# EAGLE board Interactive_SparkFun_Badge-RomePanel-v10 (EAGLE 6.6.0)
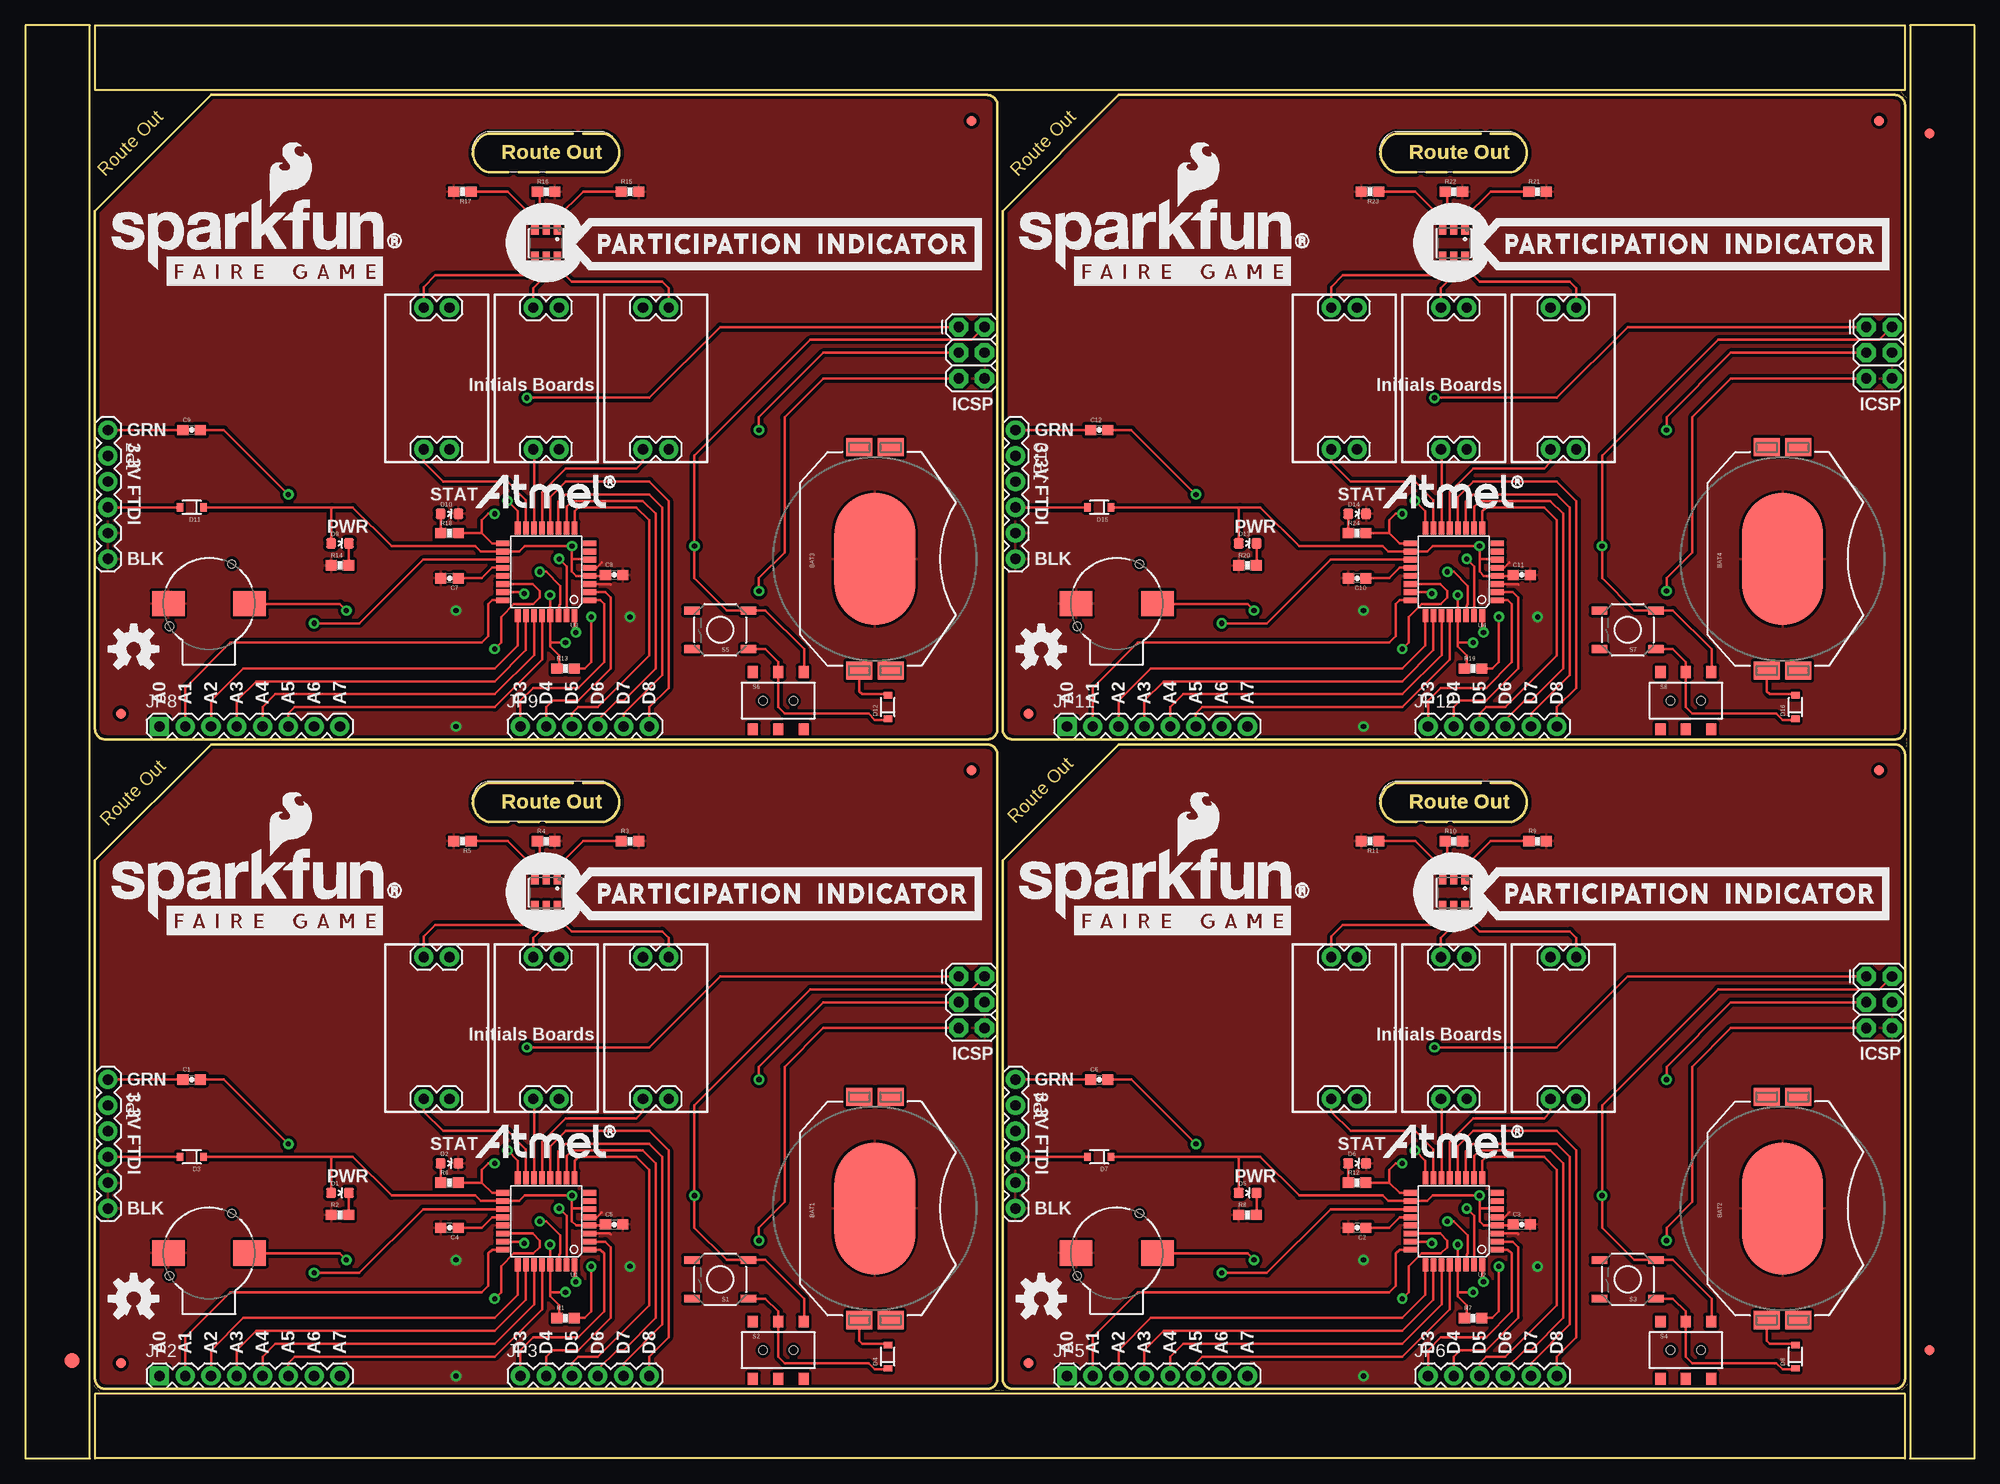
[diagram p0: board, top side]
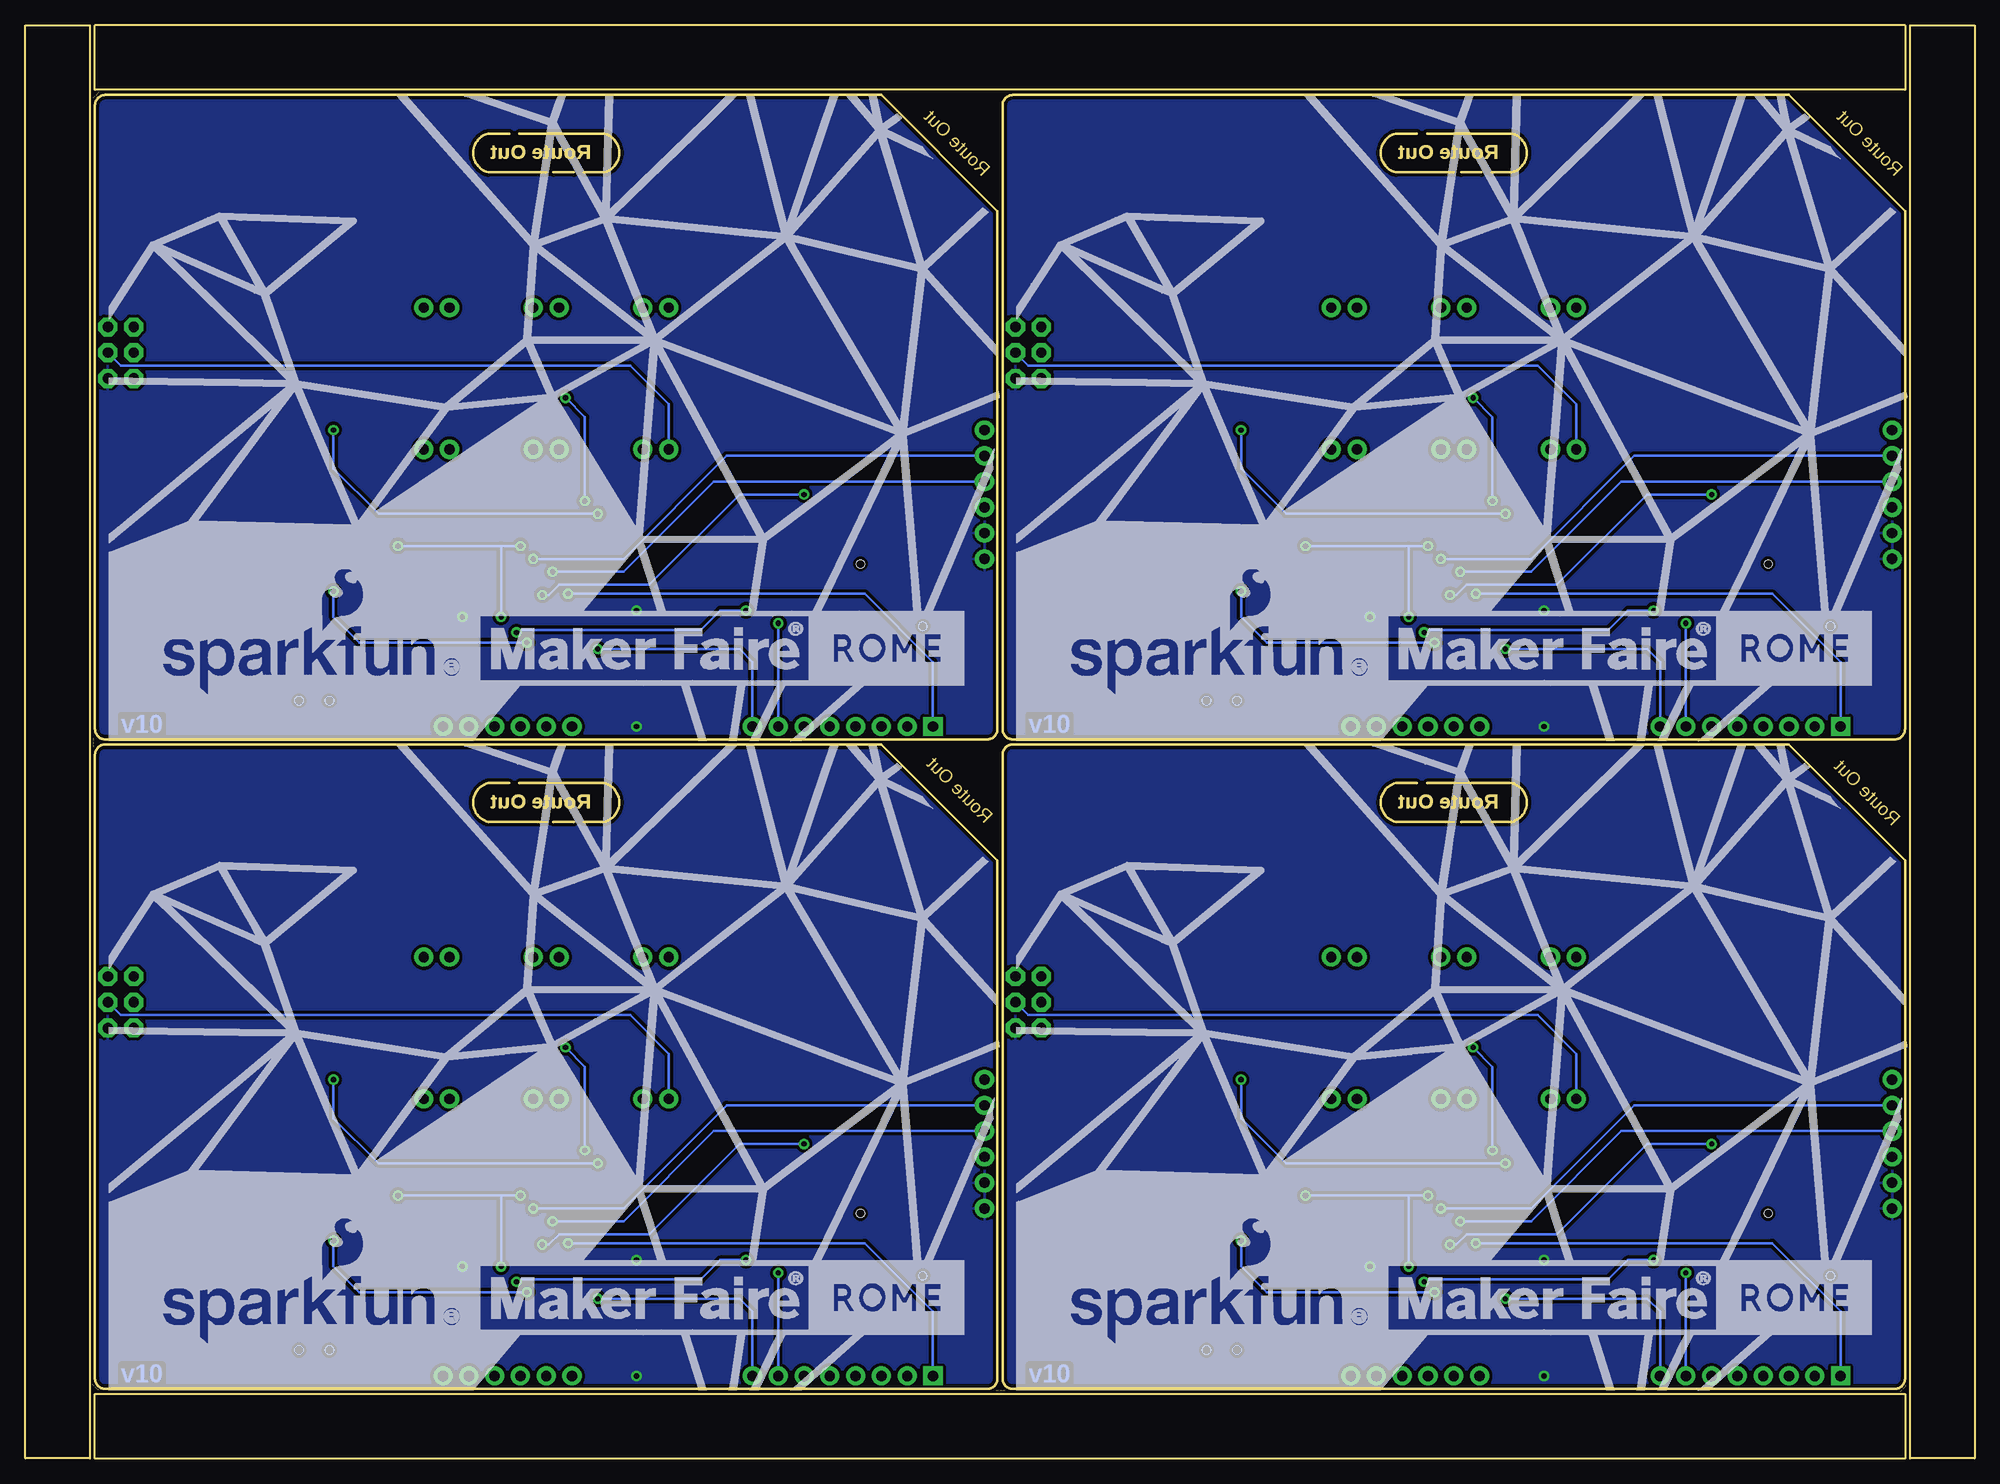
[diagram p1: board, bottom side, seen from below]

Size 192.02 x 141.22 mm. Coordinates in mm from the lower left corner, seen from the top.
Outline: 6.86,58.93 6.86,7.86 arc90 7.86,6.86 94.76,6.86 arc90 95.76,7.86 95.76,69.36 arc90 94.76,70.36 18.29,70.36 6.86,58.93
Outline: 45.59,62.74 arc-152 45.59,66.55 51.94,66.55 57.02,66.55 arc-152 57.02,62.74 51.31,62.74 45.59,62.74
Outline: 96.27,58.93 96.27,7.86 arc90 97.27,6.86 184.17,6.86 arc90 185.17,7.86 185.17,69.36 arc90 184.17,70.36 107.7,70.36 96.27,58.93
Outline: 135,62.74 arc-152 135,66.55 141.35,66.55 146.43,66.55 arc-152 146.43,62.74 140.72,62.74 135,62.74
Outline: 6.86,122.94 6.86,71.87 arc90 7.86,70.87 94.76,70.87 arc90 95.76,71.87 95.76,133.37 arc90 94.76,134.37 18.29,134.37 6.86,122.94
Outline: 45.59,126.75 arc-152 45.59,130.56 51.94,130.56 57.02,130.56 arc-152 57.02,126.75 51.31,126.75 45.59,126.75
Outline: 96.27,122.94 96.27,71.87 arc90 97.27,70.87 184.17,70.87 arc90 185.17,71.87 185.17,133.37 arc90 184.17,134.37 107.7,134.37 96.27,122.94
Outline: 135,126.75 arc-152 135,130.56 141.35,130.56 146.43,130.56 arc-152 146.43,126.75 140.72,126.75 135,126.75
Outline: 6.35,0 6.35,141.22 0,141.22 0,0 6.35,0
Outline: 6.86,6.35 6.86,0 185.17,0 185.17,6.35 6.86,6.35
Outline: 192.02,0 192.02,141.22 185.67,141.22 185.67,0 192.02,0
Outline: 185.17,134.87 185.17,141.22 6.86,141.22 6.86,134.87 185.17,134.87
Copper layers (1*16): Top 0.035mm / dielectric 1.5mm / Bottom 0.035mm
Design rules "SparkFun-2-layer": minimum track width 7mil, minimum drill 15mil, track to track 8mil, track to pad 8mil, pad to pad 8mil, via to via 8mil, smd to smd 8mil, copper to edge 8mil, drill to drill 8mil, minimum pad ring 12mil, minimum via ring 10mil, stop-mask expansion 4mil, vias tented up to drill 20mil, thermal gap 10mil

## Footprints (pad centres in the part's own frame; a part is rotated, then mirrored left to right if it is on the bottom)
BATTCON_20MM_4LEGS = smd 1.778 x 2.54: 1 -11,1.55; 3 11,1.55; P$1 -11,-1.55; P$2 11,-1.55 | smd 13 x 8: 2 0,0
0603-CAP = smd 1.1 x 1: 1 -0.85,0; 2 0.85,0
LED-0603 = smd 1 x 1: A 0,-0.877; C 0,0.877
SOD-323 = smd 0.63 x 0.83: A 1.15,0; C -1.15,0
FIDUCIAL-1.5X3 = smd 1.5 x 1.5: 1 0,0
FIDUCIAL-1X2 = smd 1 x 1: 1 0,0
2X3 = drill 1.016 pad 1.88 octagon: 1 0,0; 2 0,2.54; 3 2.54,0; 4 2.54,2.54; 5 5.08,0; 6 5.08,2.54
FTDI_BASIC = drill 1.016 pad 1.88: CTS 10.16,0; DTR 0,0; GND 12.7,0; RXI 2.54,0; TXO 5.08,0; VCC 7.62,0
1X08 = drill 1.016 pad 1.88 square: 1 0,0 | drill 1.016 pad 1.88: 2 2.54,0; 3 5.08,0; 4 7.62,0; 5 10.16,0; 6 12.7,0; 7 15.24,0; 8 17.78,0
1X06 = drill 1.016 pad 1.88: CTS 10.16,0; DTR 0,0; GND 12.7,0; RXI 2.54,0; TXO 5.08,0; VCC 7.62,0
0603-RES = smd 1.1 x 1: 1 -0.85,0; 2 0.85,0
TACTILE-SWITCH-SMD = smd 1.524 x 0.762: 1 -2.794,1.905; 2 2.794,1.905; 3 -2.794,-1.905; 4 2.794,-1.905
AYZ0202 = smd 1 x 1.15: 1 -2.5,2.825; 2 0,2.825; 3 2.5,2.825; 4 -2.5,-2.825; 5 0,-2.825; 6 2.5,-2.825 | hole 0.85: 1.5,0; -1.5,0
BUZZER-CCV = smd 3.2 x 2.5: + 4,0; - -4,0 | hole 0.8: -3.9,-2.25; 2.25,3.9
TQFP32-08 = smd 1.27 x 0.559: 1 -4.293,2.8; 2 -4.293,2; 3 -4.293,1.2; 4 -4.293,0.4; 5 -4.293,-0.4; 6 -4.293,-1.2; 7 -4.293,-2; 8 -4.293,-2.8; 17 4.293,-2.8; 18 4.293,-2; 19 4.293,-1.2; 20 4.293,-0.4; 21 4.293,0.4; 22 4.293,1.2; 23 4.293,2; 24 4.293,2.8 | smd 0.559 x 1.27: 9 -2.8,-4.293; 10 -2,-4.293; 11 -1.2,-4.293; 12 -0.4,-4.293; 13 0.4,-4.293; 14 1.2,-4.293; 15 2,-4.293; 16 2.8,-4.293; 25 2.8,4.293; 26 2,4.293; 27 1.2,4.293; 28 0.4,4.293; 29 -0.4,4.293; 30 -1.2,4.293; 31 -2,4.293; 32 -2.8,4.293
PLCC-6-LED = smd 0.7 x 1.3: AB -1.1,1.475; AG 1.1,1.475; AR 0,1.475; CB -1.1,-1.475; CG 1.1,-1.475; CR 0,-1.475
INITIALS = drill 1.016 pad 1.88: 1 3.81,1.27; 2 6.35,1.27; 3 3.81,15.24; 4 6.35,15.24; 5 14.605,1.27; 6 17.145,1.27; 7 14.605,15.24; 8 17.145,15.24; 9 25.4,1.27; 10 27.94,1.27; 11 25.4,15.24; 12 27.94,15.24

## Placement (x,y rotation side)
BAT1  20mm coincell  [BATTCON_20MM_4LEGS]  83.69,24.64 90 top
BAT2  20mm coincell  [BATTCON_20MM_4LEGS]  173.1,24.64 90 top
BAT3  20mm coincell  [BATTCON_20MM_4LEGS]  83.69,88.65 90 top
BAT4  20mm coincell  [BATTCON_20MM_4LEGS]  173.1,88.65 90 top
C1  0.1uF  [0603-CAP]  16.38,37.34 0 top
C2  0.1uF  [0603-CAP]  131.19,22.73 180 top
C3  0.1uF  [0603-CAP]  147.41,23.06 0 top
C4  0.1uF  [0603-CAP]  41.78,22.73 180 top
C5  0.1uF  [0603-CAP]  58,23.06 0 top
C6  0.1uF  [0603-CAP]  105.79,37.34 0 top
C7  0.1uF  [0603-CAP]  41.78,86.74 180 top
C8  0.1uF  [0603-CAP]  58,87.07 0 top
C9  0.1uF  [0603-CAP]  16.38,101.35 0 top
C10  0.1uF  [0603-CAP]  131.19,86.74 180 top
C11  0.1uF  [0603-CAP]  147.41,87.07 0 top
C12  0.1uF  [0603-CAP]  105.79,101.35 0 top
D1  RED  [LED-0603]  31,26.17 270 top
D2  GREEN  [LED-0603]  41.78,29.08 270 top
D3  DIODE-ZENER3.3V  [SOD-323]  16.38,29.72 180 top
D4  DIODE-ZENER3.3V  [SOD-323]  84.96,10.03 90 top
D5  RED  [LED-0603]  120.41,26.17 270 top
D6  GREEN  [LED-0603]  131.19,29.08 270 top
D7  DIODE-ZENER3.3V  [SOD-323]  105.79,29.72 180 top
D8  DIODE-ZENER3.3V  [SOD-323]  174.37,10.03 90 top
D9  RED  [LED-0603]  31,90.18 270 top
D10  GREEN  [LED-0603]  41.78,93.09 270 top
D11  DIODE-ZENER3.3V  [SOD-323]  16.38,93.73 180 top
D12  DIODE-ZENER3.3V  [SOD-323]  84.96,74.04 90 top
D13  RED  [LED-0603]  120.41,90.18 270 top
D14  GREEN  [LED-0603]  131.19,93.09 270 top
D15  DIODE-ZENER3.3V  [SOD-323]  105.79,93.73 180 top
D16  DIODE-ZENER3.3V  [SOD-323]  174.37,74.04 90 top
E$1  [FIDUCIAL-1.5X3]  4.57,9.65 0 top
E$4  [FIDUCIAL-1X2]  187.58,10.67 0 top
E$6  [FIDUCIAL-1X2]  187.58,130.56 180 top
FID1  FIDUCIAL1X2  [FIDUCIAL-1X2]  9.4,9.4 0 top
FID2  FIDUCIAL1X2  [FIDUCIAL-1X2]  93.22,67.82 0 top
FID3  FIDUCIAL1X2  [FIDUCIAL-1X2]  98.81,9.4 0 top
FID4  FIDUCIAL1X2  [FIDUCIAL-1X2]  182.63,67.82 0 top
FID5  FIDUCIAL1X2  [FIDUCIAL-1X2]  9.4,73.41 0 top
FID6  FIDUCIAL1X2  [FIDUCIAL-1X2]  93.22,131.83 0 top
FID7  FIDUCIAL1X2  [FIDUCIAL-1X2]  98.81,73.41 0 top
FID8  FIDUCIAL1X2  [FIDUCIAL-1X2]  182.63,131.83 0 top
J1  AVR_SPI_PRG_6PTH  [2X3]  91.95,47.5 270 top
J2  AVR_SPI_PRG_6PTH  [2X3]  181.36,47.5 270 top
J3  AVR_SPI_PRG_6PTH  [2X3]  91.95,111.51 270 top
J4  AVR_SPI_PRG_6PTH  [2X3]  181.36,111.51 270 top
JP1  FTDI_BASICPTH  [FTDI_BASIC]  8.13,37.34 270 top
JP2  [1X08]  13.21,8.13 0 top
JP3  [1X06]  48.77,8.13 0 top
JP4  FTDI_BASICPTH  [FTDI_BASIC]  97.54,37.34 270 top
JP5  [1X08]  102.62,8.13 0 top
JP6  [1X06]  138.18,8.13 0 top
JP7  FTDI_BASICPTH  [FTDI_BASIC]  8.13,101.35 270 top
JP8  [1X08]  13.21,72.14 0 top
JP9  [1X06]  48.77,72.14 0 top
JP10  FTDI_BASICPTH  [FTDI_BASIC]  97.54,101.35 270 top
JP11  [1X08]  102.62,72.14 0 top
JP12  [1X06]  138.18,72.14 0 top
LOGO1  OSHW-LOGOM  [OSHW-LOGO-M]  10.67,15.75 0 top
LOGO2  OSHW-LOGOM  [OSHW-LOGO-M]  100.08,15.75 0 top
LOGO3  OSHW-LOGOM  [OSHW-LOGO-M]  10.67,79.76 0 top
LOGO4  OSHW-LOGOM  [OSHW-LOGO-M]  100.08,79.76 0 top
R1  10K  [0603-RES]  53.21,13.84 0 top
R2  10K  [0603-RES]  30.99,24 0 top
R3  300  [0603-RES]  59.56,60.83 0 top
R4  100  [0603-RES]  51.31,60.83 0 top
R5  100  [0603-RES]  43.05,60.83 180 top
R6  330  [0603-RES]  41.78,27.18 0 top
R7  10K  [0603-RES]  142.62,13.84 0 top
R8  10K  [0603-RES]  120.4,24 0 top
R9  300  [0603-RES]  148.97,60.83 0 top
R10  100  [0603-RES]  140.72,60.83 0 top
R11  100  [0603-RES]  132.46,60.83 180 top
R12  330  [0603-RES]  131.19,27.18 0 top
R13  10K  [0603-RES]  53.21,77.85 0 top
R14  10K  [0603-RES]  30.99,88.01 0 top
R15  300  [0603-RES]  59.56,124.84 0 top
R16  100  [0603-RES]  51.31,124.84 0 top
R17  100  [0603-RES]  43.05,124.84 180 top
R18  330  [0603-RES]  41.78,91.19 0 top
R19  10K  [0603-RES]  142.62,77.85 0 top
R20  10K  [0603-RES]  120.4,88.01 0 top
R21  300  [0603-RES]  148.97,124.84 0 top
R22  100  [0603-RES]  140.72,124.84 0 top
R23  100  [0603-RES]  132.46,124.84 180 top
R24  330  [0603-RES]  131.19,91.19 0 top
S1  [TACTILE-SWITCH-SMD]  68.45,17.65 180 top
S2  [AYZ0202]  74.17,10.67 0 top
S3  [TACTILE-SWITCH-SMD]  157.86,17.65 180 top
S4  [AYZ0202]  163.58,10.67 0 top
S5  [TACTILE-SWITCH-SMD]  68.45,81.66 180 top
S6  [AYZ0202]  74.17,74.68 0 top
S7  [TACTILE-SWITCH-SMD]  157.86,81.66 180 top
S8  [AYZ0202]  163.58,74.68 0 top
SG1  BUZZERSMD2  [BUZZER-CCV]  18.1,20.24 0 top
SG2  BUZZERSMD2  [BUZZER-CCV]  107.51,20.24 0 top
SG3  BUZZERSMD2  [BUZZER-CCV]  18.1,84.25 0 top
SG4  BUZZERSMD2  [BUZZER-CCV]  107.51,84.25 0 top
U1  ATMEGA328P  [TQFP32-08]  51.31,23.37 180 top
U2  ATMEGA328P  [TQFP32-08]  140.72,23.37 180 top
U3  ATMEGA328P  [TQFP32-08]  51.31,87.38 180 top
U4  ATMEGA328P  [TQFP32-08]  140.72,87.38 180 top
U$1  LED-TRICOLOR-NO-COMPLCC-6-SMD  [PLCC-6-LED]  51.31,55.75 180 top
U$2  ROME_FAIRE_BACK  [ROME_BACK]  5.59,3.05 0 top
U$3  ALPHABET  [INITIALS]  67.18,50.67 180 top
U$4  FAIRE_GAME_SILK  [FAIRE_GAME_SILK]  6.22,6.1 0 top
U$5  LED-TRICOLOR-NO-COMPLCC-6-SMD  [PLCC-6-LED]  140.72,55.75 180 top
U$6  ALPHABET  [INITIALS]  156.59,50.67 180 top
U$7  FAIRE_GAME_SILK  [FAIRE_GAME_SILK]  95.63,6.1 0 top
U$8  ROME_FAIRE_BACK  [ROME_BACK]  95,3.05 0 top
U$9  LED-TRICOLOR-NO-COMPLCC-6-SMD  [PLCC-6-LED]  51.31,119.76 180 top
U$10  ALPHABET  [INITIALS]  67.18,114.68 180 top
U$11  FAIRE_GAME_SILK  [FAIRE_GAME_SILK]  6.22,70.1 0 top
U$12  ROME_FAIRE_BACK  [ROME_BACK]  5.59,67.06 0 top
U$13  LED-TRICOLOR-NO-COMPLCC-6-SMD  [PLCC-6-LED]  140.72,119.76 180 top
U$14  ALPHABET  [INITIALS]  156.59,114.68 180 top
U$15  FAIRE_GAME_SILK  [FAIRE_GAME_SILK]  95.63,70.1 0 top
U$16  ROME_FAIRE_BACK  [ROME_BACK]  95,67.06 0 top

## Library data of the parts
BAT1-BAT4 = SparkFun-Electromechanical; PROD_ID: BATT-10373
C1-C12 = SparkFun-Capacitors; PROD_ID: CAP-00810
D1 D5 D9 D13 = SparkFun-LED; PROD_ID: DIO-00819
D2 D6 D10 D14 = SparkFun-LED; PROD_ID: DIO-00821
D3 D4 D7 D8 D11 D12 D15 D16 = SparkFun-DiscreteSemi; PROD_ID: DIO-11284
E$1 = SparkFun-Retired
E$4 E$6 FID1-FID8 LOGO1-LOGO4 = SparkFun-Aesthetics
J1-J4 JP1-JP12 = SparkFun-Connectors
R1 R2 R7 R8 R13 R14 R19 R20 = SparkFun-Resistors; PROD_ID: RES-00824
R3 R9 R15 R21 = SparkFun-Resistors; PROD_ID: RES_10328
R4 R5 R10 R11 R16 R17 R22 R23 = SparkFun-Resistors; PROD_ID: RES-07863
R6 R12 R18 R24 = SparkFun-Resistors; PROD_ID: RES-00818
S1 S3 S5 S7 SG1-SG4 = SparkFun-Electromechanical
S2 S4 S6 S8 = SparkFun-Electromechanical; PROD_ID: SWCH-08179
U1-U4 = SparkFun-DigitalIC; PROD_ID: IC-09069
U$1 U$5 U$9 U$13 = SparkFun-LED; PROD_ID: DIO-12113
U$2 U$4 U$7 U$8 U$11 U$12 U$15 U$16 = Local Library
U$3 U$6 U$10 U$14 = ML8511

## Nets
3.3V: D3.A JP1.VCC
3.3V1: D7.A JP4.VCC
3.3V2: D11.A JP7.VCC
3.3V3: D15.A JP10.VCC
A0: JP2.1 U1.23
A1: JP2.2 U1.24
A2: JP2.3 U1.25
A3: JP2.4 U1.26
A4: JP5.1 U2.23
A5: JP5.2 U2.24
A6: JP2.7 U1.19
A7: JP2.8 U1.22
A8: JP5.3 U2.25
A9: JP5.4 U2.26
A10: JP5.7 U2.19
A11: JP5.8 U2.22
A12: JP8.1 U3.23
A13: JP8.2 U3.24
A14: JP8.3 U3.25
A15: JP8.4 U3.26
A16: JP8.7 U3.19
A17: JP8.8 U3.22
A18: JP11.1 U4.23
A19: JP11.2 U4.24
A20: JP11.3 U4.25
A21: JP11.4 U4.26
A22: JP11.7 U4.19
A23: JP11.8 U4.22
BLUE: U$1.AB U$3.1
BLUE1: U$5.AB U$6.1
BLUE2: U$9.AB U$10.1
BLUE3: U$13.AB U$14.1
D1: SG2.+ U2.32
D2: SG1.+ U1.32
D3: JP3.DTR U1.1
D4: JP3.RXI U1.2
D5: JP3.TXO U1.9
D6: JP3.VCC U1.10
D7: JP3.CTS U1.11
D8: JP3.GND U1.12
D9: U1.13 U$3.4
D10: U1.14 U$3.8
D11: JP6.DTR U2.1
D12: JP6.RXI U2.2
D13: JP6.TXO U2.9
D14: JP6.VCC U2.10
D15: JP6.CTS U2.11
D16: JP6.GND U2.12
D17: U2.13 U$6.4
D18: U2.14 U$6.8
D19: SG3.+ U3.32
D20: JP9.DTR U3.1
D21: JP9.RXI U3.2
D22: JP9.TXO U3.9
D23: JP9.VCC U3.10
D24: JP9.CTS U3.11
D25: JP9.GND U3.12
D26: U3.13 U$10.4
D27: U3.14 U$10.8
D28: SG4.+ U4.32
D29: JP12.DTR U4.1
D30: JP12.RXI U4.2
D31: JP12.TXO U4.9
D32: JP12.VCC U4.10
D33: JP12.CTS U4.11
D34: JP12.GND U4.12
D35: U4.13 U$14.4
D36: U4.14 U$14.8
DTR: C1.1 JP1.DTR
DTR1: C6.1 JP4.DTR
DTR2: C9.1 JP7.DTR
DTR3: C12.1 JP10.DTR
GND: BAT1.2 C4.2 C5.2 D2.C J1.6 JP1.CTS JP1.GND R2.1 R3.2 R4.2 R5.2 SG1.- U1.3 U1.5 U1.21
GND1: BAT2.2 C2.2 C3.2 D6.C J2.6 JP4.CTS JP4.GND R8.1 R9.2 R10.2 R11.2 SG2.- U2.3 U2.5 U2.21
GND2: BAT3.2 C7.2 C8.2 D10.C J3.6 JP7.CTS JP7.GND R14.1 R15.2 R16.2 R17.2 SG3.- U3.3 U3.5 U3.21
GND3: BAT4.2 C10.2 C11.2 D14.C J4.6 JP10.CTS JP10.GND R20.1 R21.2 R22.2 R23.2 SG4.- U4.3 U4.5 U4.21
GREEN: U$1.AG U$3.10
GREEN1: U$5.AG U$6.10
GREEN2: U$9.AG U$10.10
GREEN3: U$13.AG U$14.10
MISO: J1.1 U1.16
MISO1: J2.1 U2.16
MISO2: J3.1 U3.16
MISO3: J4.1 U4.16
MOSI: J1.4 U1.15 U$3.12
MOSI1: J2.4 U2.15 U$6.12
MOSI2: J3.4 U3.15 U$10.12
MOSI3: J4.4 U4.15 U$14.12
N$1: D4.C S1.1 S2.2
N$2: C2.1 U2.20
N$3: D5.C R8.2
N$4: R3.1 U$1.CB
N$5: D1.C R2.2
N$6: R4.1 U$1.CR
N$7: R5.1 U$1.CG
N$8: C4.1 U1.20
N$9: D2.A R6.1
N$10: BAT1.1 D4.A
N$11: R9.1 U$5.CB
N$12: R11.1 U$5.CG
N$13: R10.1 U$5.CR
N$14: D6.A R12.1
N$15: BAT2.1 D8.A
N$16: D8.C S3.1 S4.2
N$17: C7.1 U3.20
N$18: D9.C R14.2
N$19: R15.1 U$9.CB
N$20: R17.1 U$9.CG
N$21: R16.1 U$9.CR
N$22: D10.A R18.1
N$23: BAT3.1 D12.A
N$24: D12.C S5.1 S6.2
N$25: C10.1 U4.20
N$26: D13.C R20.2
N$27: R21.1 U$13.CB
N$28: R23.1 U$13.CG
N$29: R22.1 U$13.CR
N$30: D14.A R24.1
N$31: BAT4.1 D16.A
N$32: D16.C S7.1 S8.2
RED: U$1.AR U$3.6
RED1: U$5.AR U$6.6
RED2: U$9.AR U$10.6
RED3: U$13.AR U$14.6
RESET: C1.2 J1.5 R1.1 U1.29
RESET1: C6.2 J2.5 R7.1 U2.29
RESET2: C9.2 J3.5 R13.1 U3.29
RESET3: C12.2 J4.5 R19.1 U4.29
RXI: JP1.TXO U1.30
RXI1: JP4.TXO U2.30
RXI2: JP7.TXO U3.30
RXI3: JP10.TXO U4.30
SCK: J1.3 R6.2 U1.17
SCK1: J2.3 R12.2 U2.17
SCK2: J3.3 R18.2 U3.17
SCK3: J4.3 R24.2 U4.17
SCL: JP2.6 U1.28
SCL1: JP5.6 U2.28
SCL2: JP8.6 U3.28
SCL3: JP11.6 U4.28
SDA: JP2.5 U1.27
SDA1: JP5.5 U2.27
SDA2: JP8.5 U3.27
SDA3: JP11.5 U4.27
TXO: JP1.RXI U1.31
TXO1: JP4.RXI U2.31
TXO2: JP7.RXI U3.31
TXO3: JP10.RXI U4.31
VCC: C5.1 D1.A D3.C J1.2 R1.2 S1.3 S2.3 U1.4 U1.6 U1.18
VCC1: C3.1 D5.A D7.C J2.2 R7.2 S3.3 S4.3 U2.4 U2.6 U2.18
VCC2: C8.1 D9.A D11.C J3.2 R13.2 S5.3 S6.3 U3.4 U3.6 U3.18
VCC3: C11.1 D13.A D15.C J4.2 R19.2 S7.3 S8.3 U4.4 U4.6 U4.18

## Tracks (layer width: path | path; a pad name or v marks a point on that pad's centre or on a via)
3.3V
  Top 0.254: JP1.VCC D3.A
3.3V1
  Top 0.254: JP4.VCC D7.A
3.3V2
  Top 0.254: JP7.VCC D11.A
3.3V3
  Top 0.254: JP10.VCC D15.A
A0  (via drill 0.51)
  Top 0.254: U1.23 48.99,21.37 v49.15,21.21
  Bottom 0.254: v49.15,21.21 19.94,21.21 13.21,14.48 JP2.1
A1
  Top 0.254: U1.24 45.97,20.57 45.59,20.19 45.59,17.02 44.96,16.38 20.19,16.38 15.75,11.94 JP2.2
A2
  Top 0.254: U1.25 48.51,16.12 46.23,13.84 21.46,13.84 18.29,10.67 JP2.3
A3
  Top 0.254: U1.26 49.31,15.65 46.23,12.57 22.73,12.57 20.83,10.67 JP2.4
A4  (via drill 0.51)
  Top 0.254: U2.23 138.4,21.37 v138.56,21.21
  Bottom 0.254: v138.56,21.21 109.35,21.21 102.62,14.48 JP5.1
A5
  Top 0.254: U2.24 135.38,20.57 135,20.19 135,17.02 134.37,16.38 109.6,16.38 105.16,11.94 JP5.2
A6  (via drill 0.51)
  Top 0.254: U1.19 39.17,24.57 32.89,18.29 v28.45,18.29
  Bottom 0.254: JP2.7 v28.45,18.29
A7  (via drill 0.51)
  Top 0.254: U1.22 49.97,22.17 50.67,21.46 50.67,20.83 50.04,20.19 48.13,20.19 46.86,18.92 46.86,16.38 v46.23,15.75
  Bottom 0.254: v46.23,15.75 32.26,15.75 30.99,14.48 JP2.8
A8
  Top 0.254: U2.25 137.92,16.12 135.64,13.84 110.87,13.84 107.7,10.67 JP5.3
A9
  Top 0.254: U2.26 138.72,15.65 135.64,12.57 112.14,12.57 110.24,10.67 JP5.4
A10  (via drill 0.51)
  Top 0.254: U2.19 128.58,24.57 122.3,18.29 v117.86,18.29
  Bottom 0.254: JP5.7 v117.86,18.29
A11  (via drill 0.51)
  Top 0.254: U2.22 139.38,22.17 140.08,21.46 140.08,20.83 139.45,20.19 137.54,20.19 136.27,18.92 136.27,16.38 v135.64,15.75
  Bottom 0.254: v135.64,15.75 121.67,15.75 120.4,14.48 JP5.8
A12  (via drill 0.51)
  Top 0.254: U3.23 48.99,85.38 v49.15,85.22
  Bottom 0.254: v49.15,85.22 19.94,85.22 13.21,78.49 JP8.1
A13
  Top 0.254: U3.24 45.97,84.58 45.59,84.2 45.59,81.03 44.96,80.39 20.19,80.39 15.75,75.95 JP8.2
A14
  Top 0.254: U3.25 48.51,80.13 46.23,77.85 21.46,77.85 18.29,74.68 JP8.3
A15
  Top 0.254: U3.26 49.31,79.66 46.23,76.58 22.73,76.58 20.83,74.68 JP8.4
A16  (via drill 0.51)
  Top 0.254: U3.19 39.17,88.58 32.89,82.3 v28.45,82.3
  Bottom 0.254: JP8.7 v28.45,82.3
A17  (via drill 0.51)
  Top 0.254: U3.22 49.97,86.18 50.67,85.47 50.67,84.84 50.04,84.2 48.13,84.2 46.86,82.93 46.86,80.39 v46.23,79.76
  Bottom 0.254: v46.23,79.76 32.26,79.76 30.99,78.49 JP8.8
A18  (via drill 0.51)
  Top 0.254: U4.23 138.4,85.38 v138.56,85.22
  Bottom 0.254: v138.56,85.22 109.35,85.22 102.62,78.49 JP11.1
A19
  Top 0.254: U4.24 135.38,84.58 135,84.2 135,81.03 134.37,80.39 109.6,80.39 105.16,75.95 JP11.2
A20
  Top 0.254: U4.25 137.92,80.13 135.64,77.85 110.87,77.85 107.7,74.68 JP11.3
A21
  Top 0.254: U4.26 138.72,79.66 135.64,76.58 112.14,76.58 110.24,74.68 JP11.4
A22  (via drill 0.51)
  Top 0.254: U4.19 128.58,88.58 122.3,82.3 v117.86,82.3
  Bottom 0.254: JP11.7 v117.86,82.3
A23  (via drill 0.51)
  Top 0.254: U4.22 139.38,86.18 140.08,85.47 140.08,84.84 139.45,84.2 137.54,84.2 136.27,82.93 136.27,80.39 v135.64,79.76
  Bottom 0.254: v135.64,79.76 121.67,79.76 120.4,78.49 JP11.8
BLUE
  Top 0.254: U$1.AB 52.41,53.38 53.85,51.94 62.74,51.94 63.37,51.31 U$3.1
BLUE1
  Top 0.254: U$5.AB 141.82,53.38 143.26,51.94 152.15,51.94 152.78,51.31 U$6.1
BLUE2
  Top 0.254: U$9.AB 52.41,117.39 53.85,115.95 62.74,115.95 63.37,115.32 U$10.1
BLUE3
  Top 0.254: U$13.AB 141.82,117.39 143.26,115.95 152.15,115.95 152.78,115.32 U$14.1
D1  (via drill 0.51)
  Top 0.254: U2.32 143.52,17.52 v143.64,17.4 | 112.19,19.56 111.56,20.19 | 111.56,20.19 SG2.+ | 111.56,20.19 120.4,20.19 v121.03,19.56
  Bottom 0.254: v121.03,19.56 123.57,19.56 125.48,17.65 143.38,17.65 v143.64,17.4
D2  (via drill 0.51)
  Top 0.254: U1.32 54.11,17.52 v54.23,17.4 | 22.78,19.56 22.15,20.19 | 22.15,20.19 SG1.+ | 22.15,20.19 30.99,20.19 v31.62,19.56
  Bottom 0.254: v31.62,19.56 34.16,19.56 36.07,17.65 53.98,17.65 v54.23,17.4
D3
  Top 0.254: U1.1 56.65,20.57 57.02,20.19 57.02,14.48 54.48,11.94 50.04,11.94 48.77,10.67 JP3.DTR
D4
  Top 0.254: U1.2 57.12,21.37 57.66,20.83 57.66,13.84 54.48,10.67 51.94,10.67 51.31,10.03 JP3.RXI
D5
  Top 0.254: U1.9 54.11,29.34 54.48,29.72 60.2,29.72 61.47,28.45 61.47,15.11 56.39,10.03 54.48,10.03 53.85,9.4 JP3.TXO
D6
  Top 0.254: U1.10 53.31,29.81 53.85,30.35 60.83,30.35 62.1,29.08 62.1,13.84 58.93,10.67 58.29,10.67 56.39,8.76 JP3.VCC
D7
  Top 0.254: U1.11 52.51,30.28 53.21,30.99 61.47,30.99 62.74,29.72 62.74,13.21 58.93,9.4 JP3.CTS
D8
  Top 0.254: U1.12 51.71,30.75 53.21,32.26 61.47,32.26 63.37,30.35 63.37,11.94 61.47,10.03 JP3.GND
D9
  Top 0.254: U1.13 50.91,31.22 53.21,33.53 60.2,33.53 60.83,34.16 U$3.4
D10
  Top 0.254: U1.14 50.11,35.36 U$3.8
D11
  Top 0.254: U2.1 146.06,20.57 146.43,20.19 146.43,14.48 143.89,11.94 139.45,11.94 138.18,10.67 JP6.DTR
D12
  Top 0.254: U2.2 146.53,21.37 147.07,20.83 147.07,13.84 143.89,10.67 141.35,10.67 140.72,10.03 JP6.RXI
D13
  Top 0.254: U2.9 143.52,29.34 143.89,29.72 149.61,29.72 150.88,28.45 150.88,15.11 145.8,10.03 143.89,10.03 143.26,9.4 JP6.TXO
D14
  Top 0.254: U2.10 142.72,29.81 143.26,30.35 150.24,30.35 151.51,29.08 151.51,13.84 148.34,10.67 147.7,10.67 145.8,8.76 JP6.VCC
D15
  Top 0.254: U2.11 141.92,30.28 142.62,30.99 150.88,30.99 152.15,29.72 152.15,13.21 148.34,9.4 JP6.CTS
D16
  Top 0.254: U2.12 141.12,30.75 142.62,32.26 150.88,32.26 152.78,30.35 152.78,11.94 150.88,10.03 JP6.GND
D17
  Top 0.254: U2.13 140.32,31.22 142.62,33.53 149.61,33.53 150.24,34.16 U$6.4
D18
  Top 0.254: U2.14 139.52,35.36 U$6.8
D19  (via drill 0.51)
  Top 0.254: U3.32 54.11,81.53 v54.23,81.41 | 22.78,83.57 22.15,84.2 | 22.15,84.2 SG3.+ | 22.15,84.2 30.99,84.2 v31.62,83.57
  Bottom 0.254: v31.62,83.57 34.16,83.57 36.07,81.66 53.98,81.66 v54.23,81.41
D20
  Top 0.254: U3.1 56.65,84.58 57.02,84.2 57.02,78.49 54.48,75.95 50.04,75.95 48.77,74.68 JP9.DTR
D21
  Top 0.254: U3.2 57.12,85.38 57.66,84.84 57.66,77.85 54.48,74.68 51.94,74.68 51.31,74.04 JP9.RXI
D22
  Top 0.254: U3.9 54.11,93.35 54.48,93.73 60.2,93.73 61.47,92.46 61.47,79.12 56.39,74.04 54.48,74.04 53.85,73.41 JP9.TXO
D23
  Top 0.254: U3.10 53.31,93.82 53.85,94.36 60.83,94.36 62.1,93.09 62.1,77.85 58.93,74.68 58.29,74.68 56.39,72.77 JP9.VCC
D24
  Top 0.254: U3.11 52.51,94.29 53.21,95 61.47,95 62.74,93.73 62.74,77.22 58.93,73.41 JP9.CTS
D25
  Top 0.254: U3.12 51.71,94.76 53.21,96.27 61.47,96.27 63.37,94.36 63.37,75.95 61.47,74.04 JP9.GND
D26
  Top 0.254: U3.13 50.91,95.23 53.21,97.54 60.2,97.54 60.83,98.17 U$10.4
D27
  Top 0.254: U3.14 50.11,99.37 U$10.8
D28  (via drill 0.51)
  Top 0.254: U4.32 143.52,81.53 v143.64,81.41 | 112.19,83.57 111.56,84.2 | 111.56,84.2 SG4.+ | 111.56,84.2 120.4,84.2 v121.03,83.57
  Bottom 0.254: v121.03,83.57 123.57,83.57 125.48,81.66 143.38,81.66 v143.64,81.41
D29
  Top 0.254: U4.1 146.06,84.58 146.43,84.2 146.43,78.49 143.89,75.95 139.45,75.95 138.18,74.68 JP12.DTR
D30
  Top 0.254: U4.2 146.53,85.38 147.07,84.84 147.07,77.85 143.89,74.68 141.35,74.68 140.72,74.04 JP12.RXI
D31
  Top 0.254: U4.9 143.52,93.35 143.89,93.73 149.61,93.73 150.88,92.46 150.88,79.12 145.8,74.04 143.89,74.04 143.26,73.41 JP12.TXO
D32
  Top 0.254: U4.10 142.72,93.82 143.26,94.36 150.24,94.36 151.51,93.09 151.51,77.85 148.34,74.68 147.7,74.68 145.8,72.77 JP12.VCC
D33
  Top 0.254: U4.11 141.92,94.29 142.62,95 150.88,95 152.15,93.73 152.15,77.22 148.34,73.41 JP12.CTS
D34
  Top 0.254: U4.12 141.12,94.76 142.62,96.27 150.88,96.27 152.78,94.36 152.78,75.95 150.88,74.04 JP12.GND
D35
  Top 0.254: U4.13 140.32,95.23 142.62,97.54 149.61,97.54 150.24,98.17 U$14.4
D36
  Top 0.254: U4.14 139.52,99.37 U$14.8
DTR
  Top 0.254: JP1.DTR C1.1
DTR1
  Top 0.254: JP4.DTR C6.1
DTR2
  Top 0.254: JP7.DTR C9.1
DTR3
  Top 0.254: JP10.DTR C12.1
GND  (via drill 0.51)
  Top 0.254: U1.3 57.59,22.17 57.66,22.1 | U1.5 56.28,23.77 56.77,24.26
  other vias: 42.42,8.13 59.56,18.92 42.42,19.56
  pour Top (isolate 0.305): 6.86,69.72 6.86,7.86 arc90 7.86,6.86 94.76,6.86 arc90 95.76,7.86 95.76,69.36 arc90 94.76,70.36 6.22,70.36
  pour Bottom (isolate 0.305): 6.86,70.36 6.86,7.86 arc90 7.86,6.86 94.76,6.86 arc90 95.76,7.86 95.76,69.36 arc90 94.76,70.36
GND1  (via drill 0.51)
  Top 0.254: U2.3 147,22.17 147.07,22.1 | U2.5 145.69,23.77 146.18,24.26
  other vias: 131.83,8.13 148.97,18.92 131.83,19.56
  pour Top (isolate 0.305): 96.27,69.72 96.27,7.86 arc90 97.27,6.86 184.17,6.86 arc90 185.17,7.86 185.17,69.36 arc90 184.17,70.36 95.63,70.36
  pour Bottom (isolate 0.305): 96.27,70.36 96.27,7.86 arc90 97.27,6.86 184.17,6.86 arc90 185.17,7.86 185.17,69.36 arc90 184.17,70.36
GND2  (via drill 0.51)
  Top 0.254: U3.3 57.59,86.18 57.66,86.11 | U3.5 56.28,87.78 56.77,88.27
  other vias: 42.42,72.14 59.56,82.93 42.42,83.57
  pour Top (isolate 0.305): 6.86,133.73 6.86,71.87 arc90 7.86,70.87 94.76,70.87 arc90 95.76,71.87 95.76,133.37 arc90 94.76,134.37 6.22,134.37
  pour Bottom (isolate 0.305): 6.86,134.37 6.86,71.87 arc90 7.86,70.87 94.76,70.87 arc90 95.76,71.87 95.76,133.37 arc90 94.76,134.37
GND3  (via drill 0.51)
  Top 0.254: U4.3 147,86.18 147.07,86.11 | U4.5 145.69,87.78 146.18,88.27
  other vias: 131.83,72.14 148.97,82.93 131.83,83.57
  pour Top (isolate 0.305): 96.27,133.73 96.27,71.87 arc90 97.27,70.87 184.17,70.87 arc90 185.17,71.87 185.17,133.37 arc90 184.17,134.37 95.63,134.37
  pour Bottom (isolate 0.305): 96.27,134.37 96.27,71.87 arc90 97.27,70.87 184.17,70.87 arc90 185.17,71.87 185.17,133.37 arc90 184.17,134.37
GREEN
  Top 0.254: U$3.10 39.24,51.44 40.39,52.58 49.4,52.58 50.21,53.38 U$1.AG
GREEN1
  Top 0.254: U$6.10 128.65,51.44 129.79,52.58 138.81,52.58 139.62,53.38 U$5.AG
GREEN2
  Top 0.254: U$10.10 39.24,115.44 40.39,116.59 49.4,116.59 50.21,117.39 U$9.AG
GREEN3
  Top 0.254: U$14.10 128.65,115.44 129.79,116.59 138.81,116.59 139.62,117.39 U$13.AG
MISO  (via drill 0.51)
  Top 0.254: U1.16 48.51,29.34 v47.5,30.35 | v49.4,40.51 61.47,40.51 68.45,47.5 J1.1
  Bottom 0.254: v47.5,30.35 47.5,38.61 v49.4,40.51
MISO1  (via drill 0.51)
  Top 0.254: U2.16 137.92,29.34 v136.91,30.35 | v138.81,40.51 150.88,40.51 157.86,47.5 J2.1
  Bottom 0.254: v136.91,30.35 136.91,38.61 v138.81,40.51
MISO2  (via drill 0.51)
  Top 0.254: U3.16 48.51,93.35 v47.5,94.36 | v49.4,104.52 61.47,104.52 68.45,111.51 J3.1
  Bottom 0.254: v47.5,94.36 47.5,102.62 v49.4,104.52
MISO3  (via drill 0.51)
  Top 0.254: U4.16 137.92,93.35 v136.91,94.36 | v138.81,104.52 150.88,104.52 157.86,111.51 J4.1
  Bottom 0.254: v136.91,94.36 136.91,102.62 v138.81,104.52
MOSI
  Top 0.254: U1.15 49.31,30.45 47.5,32.26 41.15,32.26 39.24,34.16 U$3.12
  Bottom 0.254: J1.4 93.22,43.69 43.05,43.69 39.24,39.88 U$3.12
MOSI1
  Top 0.254: U2.15 138.72,30.45 136.91,32.26 130.56,32.26 128.65,34.16 U$6.12
  Bottom 0.254: J2.4 182.63,43.69 132.46,43.69 128.65,39.88 U$6.12
MOSI2
  Top 0.254: U3.15 49.31,94.46 47.5,96.27 41.15,96.27 39.24,98.17 U$10.12
  Bottom 0.254: J3.4 93.22,107.7 43.05,107.7 39.24,103.89 U$10.12
MOSI3
  Top 0.254: U4.15 138.72,94.46 136.91,96.27 130.56,96.27 128.65,98.17 U$14.12
  Bottom 0.254: J4.4 182.63,107.7 132.46,107.7 128.65,103.89 U$14.12
N$1
  Top 0.254: S1.1 72.9,15.75 74.17,14.48 S2.2 74.17,10.03 74.8,9.4 83.06,9.4 83.69,8.76 84.84,8.76 D4.C
N$2
  Top 0.254: U2.20 135.4,23.77 134.37,22.73 C2.1
N$3
  Top 0.254: 121.03,24.22 R8.2 121.28,24.04 D5.C
N$4
  Top 0.254: U$1.CB 52.41,58.29 54.95,60.83 R3.1
N$5
  Top 0.254: 31.62,24.22 R2.2 31.88,24.04 D1.C
N$6
  Top 0.254: U$1.CR 51.31,58.93 50.67,59.56 50.67,60.62 R4.1
N$7
  Top 0.254: U$1.CG 50.21,58.12 47.5,60.83 R5.1
N$8
  Top 0.254: U1.20 45.99,23.77 44.96,22.73 C4.1
N$9
  Top 0.254: D2.A 40.91,27.2 R6.1
N$10
  Top 0.254: BAT1.1 82.14,11.58 82.42,11.3 84.84,11.3 D4.A
N$11
  Top 0.254: U$5.CB 141.82,58.29 144.36,60.83 R9.1
N$12
  Top 0.254: U$5.CG 139.62,58.12 136.91,60.83 R11.1
N$13
  Top 0.254: U$5.CR 140.72,58.93 140.08,59.56 140.08,60.62 R10.1
N$14
  Top 0.254: D6.A 130.31,27.2 R12.1
N$15
  Top 0.254: BAT2.1 171.55,11.58 171.83,11.3 174.25,11.3 D8.A
N$16
  Top 0.254: S3.1 162.31,15.75 163.58,14.48 S4.2 163.58,10.03 164.21,9.4 172.47,9.4 173.1,8.76 174.25,8.76 D8.C
N$17
  Top 0.254: U3.20 45.99,87.78 44.96,86.74 C7.1
N$18
  Top 0.254: 31.62,88.23 R14.2 31.88,88.05 D9.C
N$19
  Top 0.254: U$9.CB 52.41,122.3 54.95,124.84 R15.1
N$20
  Top 0.254: U$9.CG 50.21,122.13 47.5,124.84 R17.1
N$21
  Top 0.254: U$9.CR 51.31,122.94 50.67,123.57 50.67,124.63 R16.1
N$22
  Top 0.254: D10.A 40.91,91.21 R18.1
N$23
  Top 0.254: BAT3.1 82.14,75.59 82.42,75.31 84.84,75.31 D12.A
N$24
  Top 0.254: S5.1 72.9,79.76 74.17,78.49 S6.2 74.17,74.04 74.8,73.41 83.06,73.41 83.69,72.77 84.84,72.77 D12.C
N$25
  Top 0.254: U4.20 135.4,87.78 134.37,86.74 C10.1
N$26
  Top 0.254: 121.03,88.23 R20.2 121.28,88.05 D13.C
N$27
  Top 0.254: U$13.CB 141.82,122.3 144.36,124.84 R21.1
N$28
  Top 0.254: U$13.CG 139.62,122.13 136.91,124.84 R23.1
N$29
  Top 0.254: U$13.CR 140.72,122.94 140.08,123.57 140.08,124.63 R22.1
N$30
  Top 0.254: D14.A 130.31,91.21 R24.1
N$31
  Top 0.254: BAT4.1 171.55,75.59 171.83,75.31 174.25,75.31 D16.A
N$32
  Top 0.254: S7.1 162.31,79.76 163.58,78.49 S8.2 163.58,74.04 164.21,73.41 172.47,73.41 173.1,72.77 174.25,72.77 D16.C
RED
  Top 0.254: U$1.AR 51.31,52.58 50.04,51.31 U$3.6
RED1
  Top 0.254: U$5.AR 140.72,52.58 139.45,51.31 U$6.6
RED2
  Top 0.254: U$9.AR 51.31,116.59 50.04,115.32 U$10.6
RED3
  Top 0.254: U$13.AR 140.72,116.59 139.45,115.32 U$14.6
RESET  (via drill 0.51)
  Top 0.254: 51.71,16.38 U1.29 51.71,21.06 v51.69,21.08 | 51.71,16.38 51.71,15.98 52.58,15.11 52.58,14.06 R1.1 | v53.21,16.38 51.71,16.38 | J1.5 78.61,42.42 74.8,38.61 74.8,25.27 72.26,22.73 v72.26,21.46 | v25.91,30.99 19.56,37.34 C1.2
  Bottom 0.254: v51.69,21.08 51.05,21.08 50.04,22.1 41.15,22.1 32.26,30.99 v25.91,30.99 | v53.21,16.38 69.72,16.38 72.26,18.92 v72.26,21.46
RESET1  (via drill 0.51)
  Top 0.254: 141.12,16.38 U2.29 141.12,21.06 v141.1,21.08 | 141.12,16.38 141.12,15.98 141.99,15.11 141.99,14.06 R7.1 | v142.62,16.38 141.12,16.38 | J2.5 168.02,42.42 164.21,38.61 164.21,25.27 161.67,22.73 v161.67,21.46 | v115.32,30.99 108.97,37.34 C6.2
  Bottom 0.254: v141.1,21.08 140.46,21.08 139.45,22.1 130.56,22.1 121.67,30.99 v115.32,30.99 | v142.62,16.38 159.13,16.38 161.67,18.92 v161.67,21.46
RESET2  (via drill 0.51)
  Top 0.254: 51.71,80.39 U3.29 51.71,85.07 v51.69,85.09 | 51.71,80.39 51.71,79.99 52.58,79.12 52.58,78.07 R13.1 | v53.21,80.39 51.71,80.39 | J3.5 78.61,106.43 74.8,102.62 74.8,89.28 72.26,86.74 v72.26,85.47 | v25.91,95 19.56,101.35 C9.2
  Bottom 0.254: v51.69,85.09 51.05,85.09 50.04,86.11 41.15,86.11 32.26,95 v25.91,95 | v53.21,80.39 69.72,80.39 72.26,82.93 v72.26,85.47
RESET3  (via drill 0.51)
  Top 0.254: 141.12,80.39 U4.29 141.12,85.07 v141.1,85.09 | 141.12,80.39 141.12,79.99 141.99,79.12 141.99,78.07 R19.1 | v142.62,80.39 141.12,80.39 | J4.5 168.02,106.43 164.21,102.62 164.21,89.28 161.67,86.74 v161.67,85.47 | v115.32,95 108.97,101.35 C12.2
  Bottom 0.254: v141.1,85.09 140.46,85.09 139.45,86.11 130.56,86.11 121.67,95 v115.32,95 | v142.62,80.39 159.13,80.39 161.67,82.93 v161.67,85.47
RXI  (via drill 0.51)
  Top 0.254: v50.67,23.37 51.31,23.37 52.7,21.97 52.7,20.19 52.58,20.07 52.58,19.14 U1.30
  Bottom 0.254: JP1.TXO 34.8,32.26 43.69,23.37 v50.67,23.37
RXI1  (via drill 0.51)
  Top 0.254: v140.08,23.37 140.72,23.37 142.11,21.97 142.11,20.19 141.99,20.07 141.99,19.14 U2.30
  Bottom 0.254: JP4.TXO 124.21,32.26 133.1,23.37 v140.08,23.37
RXI2  (via drill 0.51)
  Top 0.254: v50.67,87.38 51.31,87.38 52.7,85.98 52.7,84.2 52.58,84.07 52.58,83.15 U3.30
  Bottom 0.254: JP7.TXO 34.8,96.27 43.69,87.38 v50.67,87.38
RXI3  (via drill 0.51)
  Top 0.254: v140.08,87.38 140.72,87.38 142.11,85.98 142.11,84.2 141.99,84.07 141.99,83.15 U4.30
  Bottom 0.254: JP10.TXO 124.21,96.27 133.1,87.38 v140.08,87.38
SCK  (via drill 0.51)
  Top 0.254: U1.17 45.97,26.17 44.96,27.18 | 44.96,27.18 R6.2 | 44.96,27.18 44.96,28.45 45.59,29.08 v46.23,29.08 | J1.3 78.61,44.96 72.26,38.61 v72.26,37.34
  Bottom 0.254: v72.26,37.34 72.26,33.53 67.82,29.08 v46.23,29.08
SCK1  (via drill 0.51)
  Top 0.254: U2.17 135.38,26.17 134.37,27.18 | 134.37,27.18 R12.2 | 134.37,27.18 134.37,28.45 135,29.08 v135.64,29.08 | J2.3 168.02,44.96 161.67,38.61 v161.67,37.34
  Bottom 0.254: v161.67,37.34 161.67,33.53 157.23,29.08 v135.64,29.08
SCK2  (via drill 0.51)
  Top 0.254: U3.17 45.97,90.18 44.96,91.19 | 44.96,91.19 R18.2 | 44.96,91.19 44.96,92.46 45.59,93.09 v46.23,93.09 | J3.3 78.61,108.97 72.26,102.62 v72.26,101.35
  Bottom 0.254: v72.26,101.35 72.26,97.54 67.82,93.09 v46.23,93.09
SCK3  (via drill 0.51)
  Top 0.254: U4.17 135.38,90.18 134.37,91.19 | 134.37,91.19 R24.2 | 134.37,91.19 134.37,92.46 135,93.09 v135.64,93.09 | J4.3 168.02,108.97 161.67,102.62 v161.67,101.35
  Bottom 0.254: v161.67,101.35 161.67,97.54 157.23,93.09 v135.64,93.09
SCL
  Top 0.254: U1.28 50.91,14.71 46.23,10.03 26.54,10.03 25.91,9.4 JP2.6
SCL1
  Top 0.254: U2.28 140.32,14.71 135.64,10.03 115.95,10.03 115.32,9.4 JP5.6
SCL2
  Top 0.254: U3.28 50.91,78.72 46.23,74.04 26.54,74.04 25.91,73.41 JP8.6
SCL3
  Top 0.254: U4.28 140.32,78.72 135.64,74.04 115.95,74.04 115.32,73.41 JP11.6
SDA
  Top 0.254: U1.27 50.11,15.18 46.23,11.3 24.64,11.3 23.37,10.03 JP2.5
SDA1
  Top 0.254: U2.27 139.52,15.18 135.64,11.3 114.05,11.3 112.78,10.03 JP5.5
SDA2
  Top 0.254: U3.27 50.11,79.19 46.23,75.31 24.64,75.31 23.37,74.04 JP8.5
SDA3
  Top 0.254: U4.27 139.52,79.19 135.64,75.31 114.05,75.31 112.78,74.04 JP11.5
TXO  (via drill 0.51)
  Top 0.254: U1.31 53.31,23.91 v52.58,24.64
  Bottom 0.254: v52.58,24.64 43.69,24.64 33.53,34.8 JP1.RXI
TXO1  (via drill 0.51)
  Top 0.254: U2.31 142.72,23.91 v141.99,24.64
  Bottom 0.254: v141.99,24.64 133.1,24.64 122.94,34.8 JP4.RXI
TXO2  (via drill 0.51)
  Top 0.254: U3.31 53.31,87.92 v52.58,88.65
  Bottom 0.254: v52.58,88.65 43.69,88.65 33.53,98.81 JP7.RXI
TXO3  (via drill 0.51)
  Top 0.254: U4.31 142.72,87.92 v141.99,88.65
  Bottom 0.254: v141.99,88.65 133.1,88.65 122.94,98.81 JP10.RXI
VCC  (via drill 0.51)
  Top 0.254: J1.2 93.22,46.23 77.34,46.23 65.91,34.8 v65.91,25.91 65.91,22.73 69.09,19.56 S1.3 72.9,19.56 76.71,15.75 76.71,13.53 S2.3 | 53.85,24.64 v53.85,25.91 49.21,25.91 48.67,25.37 U1.18 44.86,25.37 44.32,25.91 36.07,25.91 32.26,29.72 30.23,29.72 | 53.85,24.64 55.53,24.64 U1.6 | 53.85,24.64 53.85,23.37 54.25,22.97 U1.4 57.06,22.97 C5.1 | v55.75,18.92 55.75,14.48 55.12,13.84 R1.2 | D1.A 30.12,29.61 30.23,29.72 | D3.C 30.23,29.72
  Bottom 0.254: v55.75,18.92 55.75,25.91 | v65.91,25.91 55.75,25.91 | 55.75,25.91 v53.85,25.91
VCC1  (via drill 0.51)
  Top 0.254: J2.2 182.63,46.23 166.75,46.23 155.32,34.8 v155.32,25.91 155.32,22.73 158.5,19.56 S3.3 162.31,19.56 166.12,15.75 166.12,13.53 S4.3 | 143.26,24.64 v143.26,25.91 138.62,25.91 138.08,25.37 U2.18 134.27,25.37 133.73,25.91 125.48,25.91 121.67,29.72 119.63,29.72 | 143.26,24.64 144.94,24.64 U2.6 | 143.26,24.64 143.26,23.37 143.66,22.97 U2.4 146.47,22.97 C3.1 | v145.16,18.92 145.16,14.48 144.53,13.84 R7.2 | D5.A 119.53,29.61 119.63,29.72 | D7.C 119.63,29.72
  Bottom 0.254: v145.16,18.92 145.16,25.91 | v155.32,25.91 145.16,25.91 | 145.16,25.91 v143.26,25.91
VCC2  (via drill 0.51)
  Top 0.254: J3.2 93.22,110.24 77.34,110.24 65.91,98.81 v65.91,89.92 65.91,86.74 69.09,83.57 S5.3 72.9,83.57 76.71,79.76 76.71,77.54 S6.3 | 53.85,88.65 v53.85,89.92 49.21,89.92 48.67,89.38 U3.18 44.86,89.38 44.32,89.92 36.07,89.92 32.26,93.73 30.23,93.73 | 53.85,88.65 55.53,88.65 U3.6 | 53.85,88.65 53.85,87.38 54.25,86.98 U3.4 57.06,86.98 C8.1 | v55.75,82.93 55.75,78.49 55.12,77.85 R13.2 | D9.A 30.12,93.62 30.23,93.73 | D11.C 30.23,93.73
  Bottom 0.254: v55.75,82.93 55.75,89.92 | v65.91,89.92 55.75,89.92 | 55.75,89.92 v53.85,89.92
VCC3  (via drill 0.51)
  Top 0.254: J4.2 182.63,110.24 166.75,110.24 155.32,98.81 v155.32,89.92 155.32,86.74 158.5,83.57 S7.3 162.31,83.57 166.12,79.76 166.12,77.54 S8.3 | 143.26,88.65 v143.26,89.92 138.62,89.92 138.08,89.38 U4.18 134.27,89.38 133.73,89.92 125.48,89.92 121.67,93.73 119.63,93.73 | 143.26,88.65 144.94,88.65 U4.6 | 143.26,88.65 143.26,87.38 143.66,86.98 U4.4 146.47,86.98 C11.1 | v145.16,82.93 145.16,78.49 144.53,77.85 R19.2 | D13.A 119.53,93.62 119.63,93.73 | D15.C 119.63,93.73
  Bottom 0.254: v145.16,82.93 145.16,89.92 | v155.32,89.92 145.16,89.92 | 145.16,89.92 v143.26,89.92

## Text on the board
Bottom: v10 | v10 | v10 | v10
Dimension: Route Out | Route Out | Route Out | Route Out | Route Out | Route Out | Route Out | Route Out | Route Out | Route Out | Route Out | Route Out | Route Out
tPlace: Route Out | Route Out | Initials Boards | Initials Boards | ICSP | ICSP | GRN | GRN | 3.3V FTDI | 3.3V FTDI | STAT | STAT | PWR | PWR | BLK | BLK | A0 | A1 | A2 | A3 | A4 | A5 | A6 | A7 | D3 | D4 | D5 | D6 | D7 | D8 | A0 | A1 | A2 | A3 | A4 | A5 | A6 | A7 | D3 | D4 | D5 | D6 | D7 | D8 | Route Out | Route Out | Initials Boards | Initials Boards | ICSP | ICSP | GRN | GRN | 3.3V FTDI | 3.3V FTDI | STAT | STAT | PWR | PWR | BLK | BLK | A0 | A1 | A2 | A3 | A4 | A5 | A6 | A7 | D3 | D4 | D5 | D6 | D7 | D8 | A0 | A1 | A2 | A3 | A4 | A5 | A6 | A7 | D3 | D4 | D5 | D6 | D7 | D8
bPlace: Route Out | Route Out | Route Out | Route Out